# EAGLE board CT_schematic (EAGLE 7.6.0)

Size 100 x 80 mm. Coordinates in mm from the lower left corner, seen from the top.
Outline: 0,0 100,0 100,80 0,80 0,0
Copper layers (1*16): Top 0.035mm / dielectric 1.5mm / Bottom 0.035mm
Design rules "default": minimum track width 10mil, minimum drill 24mil, track to track 8mil, track to pad 8mil, pad to pad 8mil, via to via 8mil, smd to smd 8mil, copper to edge 40mil, drill to drill 8mil, minimum pad ring 10mil, minimum via ring 8mil, stop-mask expansion 4mil, vias tented up to drill 0mil, thermal gap 10mil

## Footprints (pad centres in the part's own frame; a part is rotated, then mirrored left to right if it is on the bottom)
C0603 = smd 0.8 x 0.8: 1 -0.762,0; 2 0.762,0
C0402 = smd 0.5 x 0.5: 1 -0.508,0; 2 0.508,0
C0805 = smd 1.2 x 1.3: 1 -1.016,0; 2 1.016,0
C1210 = smd 1.2 x 2.5: 1 -1.524,0; 2 1.524,0
EXV-9H = smd 3.505 x 1.676: 1 -2.857,0; 2 2.857,0
L0603 = smd 0.8 x 0.8: 1 -0.762,0; 2 0.762,0
R0603 = smd 0.8 x 0.8: 1 -0.762,0; 2 0.762,0
IND_PM3316 = smd 2.921 x 2.794: 1 -5.144,0; 2 5.144,0
L0806 = smd 1.016 x 1.524: 1 -0.889,0; 2 0.889,0
PJ-037B_PACKAGE = drill 3.7 square: 1 12,0 | drill 3.2 square: 2 6,0
LQFP176 = smd 0.3 x 1.2: 1 -10.75,-12.75; 2 -10.25,-12.75; 3 -9.75,-12.75; 4 -9.25,-12.75; 5 -8.75,-12.75; 6 -8.25,-12.75; 7 -7.75,-12.75; 8 -7.25,-12.75; 9 -6.75,-12.75; 10 -6.25,-12.75; 11 -5.75,-12.75; 12 -5.25,-12.75; 13 -4.75,-12.75; 14 -4.25,-12.75; 15 -3.75,-12.75; 16 -3.25,-12.75; 17 -2.75,-12.75; 18 -2.25,-12.75; 19 -1.75,-12.75; 20 -1.25,-12.75; 21 -0.75,-12.75; 22 -0.25,-12.75; 23 0.25,-12.75; 24 0.75,-12.75; 25 1.25,-12.75; 26 1.75,-12.75; 27 2.25,-12.75; 28 2.75,-12.75; 29 3.25,-12.75; 30 3.75,-12.75; 31 4.25,-12.75; 32 4.75,-12.75; 33 5.25,-12.75; 34 5.75,-12.75; 35 6.25,-12.75; 36 6.75,-12.75; 37 7.25,-12.75; 38 7.75,-12.75; 39 8.25,-12.75; 40 8.75,-12.75; 41 9.25,-12.75; 42 9.75,-12.75; 43 10.25,-12.75; 44 10.75,-12.75; 89 10.75,12.75; 90 10.25,12.75; 91 9.75,12.75; 92 9.25,12.75; 93 8.75,12.75; 94 8.25,12.75; 95 7.75,12.75; 96 7.25,12.75; 97 6.75,12.75; 98 6.25,12.75; 99 5.75,12.75; 100 5.25,12.75; 101 4.75,12.75; 102 4.25,12.75; 103 3.75,12.75; 104 3.25,12.75; 105 2.75,12.75; 106 2.25,12.75; 107 1.75,12.75; 108 1.25,12.75; 109 0.75,12.75; 110 0.25,12.75; 111 -0.25,12.75; 112 -0.75,12.75; 113 -1.25,12.75; 114 -1.75,12.75; 115 -2.25,12.75; 116 -2.75,12.75; 117 -3.25,12.75; 118 -3.75,12.75; 119 -4.25,12.75; 120 -4.75,12.75; 121 -5.25,12.75; 122 -5.75,12.75; 123 -6.25,12.75; 124 -6.75,12.75; 125 -7.25,12.75; 126 -7.75,12.75; 127 -8.25,12.75; 128 -8.75,12.75; 129 -9.25,12.75; 130 -9.75,12.75; 131 -10.25,12.75; 132 -10.75,12.75 | smd 1.2 x 0.3: 45 12.75,-10.75; 46 12.75,-10.25; 47 12.75,-9.75; 48 12.75,-9.25; 49 12.75,-8.75; 50 12.75,-8.25; 51 12.75,-7.75; 52 12.75,-7.25; 53 12.75,-6.75; 54 12.75,-6.25; 55 12.75,-5.75; 56 12.75,-5.25; 57 12.75,-4.75; 58 12.75,-4.25; 59 12.75,-3.75; 60 12.75,-3.25; 61 12.75,-2.75; 62 12.75,-2.25; 63 12.75,-1.75; 64 12.75,-1.25; 65 12.75,-0.75; 66 12.75,-0.25; 67 12.75,0.25; 68 12.75,0.75; 69 12.75,1.25; 70 12.75,1.75; 71 12.75,2.25; 72 12.75,2.75; 73 12.75,3.25; 74 12.75,3.75; 75 12.75,4.25; 76 12.75,4.75; 77 12.75,5.25; 78 12.75,5.75; 79 12.75,6.25; 80 12.75,6.75; 81 12.75,7.25; 82 12.75,7.75; 83 12.75,8.25; 84 12.75,8.75; 85 12.75,9.25; 86 12.75,9.75; 87 12.75,10.25; 88 12.75,10.75; 133 -12.75,10.75; 134 -12.75,10.25; 135 -12.75,9.75; 136 -12.75,9.25; 137 -12.75,8.75; 138 -12.75,8.25; 139 -12.75,7.75; 140 -12.75,7.25; 141 -12.75,6.75; 142 -12.75,6.25; 143 -12.75,5.75; 144 -12.75,5.25; 145 -12.75,4.75; 146 -12.75,4.25; 147 -12.75,3.75; 148 -12.75,3.25; 149 -12.75,2.75; 150 -12.75,2.25; 151 -12.75,1.75; 152 -12.75,1.25; 153 -12.75,0.75; 154 -12.75,0.25; 155 -12.75,-0.25; 156 -12.75,-0.75; 157 -12.75,-1.25; 158 -12.75,-1.75; 159 -12.75,-2.25; 160 -12.75,-2.75; 161 -12.75,-3.25; 162 -12.75,-3.75; 163 -12.75,-4.25; 164 -12.75,-4.75; 165 -12.75,-5.25; 166 -12.75,-5.75; 167 -12.75,-6.25; 168 -12.75,-6.75; 169 -12.75,-7.25; 170 -12.75,-7.75; 171 -12.75,-8.25; 172 -12.75,-8.75; 173 -12.75,-9.25; 174 -12.75,-9.75; 175 -12.75,-10.25; 176 -12.75,-10.75
SOT-23-6 = smd 1.1 x 0.6: 1 -1.4,0.95; 2 -1.4,0; 3 -1.4,-0.95; 4 1.4,-0.95; 5 1.4,0; 6 1.4,0.95
SSOP-28 = smd 1.5 x 0.4: 1 -3.625,4.225; 2 -3.625,3.575; 3 -3.625,2.925; 4 -3.625,2.275; 5 -3.625,1.625; 6 -3.625,0.975; 7 -3.625,0.325; 8 -3.625,-0.325; 9 -3.625,-0.975; 10 -3.625,-1.625; 11 -3.625,-2.275; 12 -3.625,-2.925; 13 -3.625,-3.575; 14 -3.625,-4.225; 15 3.625,-4.225; 16 3.625,-3.575; 17 3.625,-2.925; 18 3.625,-2.275; 19 3.625,-1.625; 20 3.625,-0.975; 21 3.625,-0.325; 22 3.625,0.325; 23 3.625,0.975; 24 3.625,1.625; 25 3.625,2.275; 26 3.625,2.925; 27 3.625,3.575; 28 3.625,4.225
FCI_10118193-0001LF = smd 0.4 x 1.35: 1 -1.3,2.675; 2 -0.65,2.675; 3 0,2.675; 4 0.65,2.675; 5 1.3,2.675 | smd 1.6 x 1.4: 6 -3.2,2.45; 7 3.2,2.45 | smd 1.9 x 1.9: 8 -1.2,0; 9 1.2,0 | hole 0.5: -3.3,0; 3.3,0
SOT-23-8 = smd 0.4 x 1.2: 1 -0.975,-1.3; 2 -0.325,-1.3; 3 0.325,-1.3; 4 0.975,-1.3; 5 0.975,1.3; 6 0.325,1.3; 7 -0.325,1.3; 8 -0.975,1.3
182-009-MALE = drill 1.194 pad 1.524 octagon: 1 -5.537,10.923; 2 -2.769,10.923; 3 0,10.923; 4 2.769,10.923; 5 5.537,10.923; 6 -4.153,8.08; 7 -1.384,8.08; 8 1.384,8.08; 9 4.153,8.08 | hole 3.048: -12.446,9.501; 12.446,9.501
TFBGA-153 = smd 0.3 x 0.3: A1 -3.25,3.25; A2 -2.75,3.25; A3 -2.25,3.25; A4 -1.75,3.25; A5 -1.25,3.25; A6 -0.75,3.25; A7 -0.25,3.25; A8 0.25,3.25; A9 0.75,3.25; A10 1.25,3.25; A11 1.75,3.25; A12 2.25,3.25; A13 2.75,3.25; A14 3.25,3.25; B1 -3.25,2.75; B2 -2.75,2.75; B3 -2.25,2.75; B4 -1.75,2.75; B5 -1.25,2.75; B6 -0.75,2.75; B7 -0.25,2.75; B8 0.25,2.75; B9 0.75,2.75; B10 1.25,2.75; B11 1.75,2.75; B12 2.25,2.75; B13 2.75,2.75; B14 3.25,2.75; C1 -3.25,2.25; C2 -2.75,2.25; C3 -2.25,2.25; C4 -1.75,2.25; C5 -1.25,2.25; C6 -0.75,2.25; C7 -0.25,2.25; C8 0.25,2.25; C9 0.75,2.25; C10 1.25,2.25; C11 1.75,2.25; C12 2.25,2.25; C13 2.75,2.25; C14 3.25,2.25; D1 -3.25,1.75; D2 -2.75,1.75; D3 -2.25,1.75; D4 -1.75,1.75; D12 2.25,1.75; D13 2.75,1.75; D14 3.25,1.75; E1 -3.25,1.25; E2 -2.75,1.25; E3 -2.25,1.25; E5 -1.25,1.25; E6 -0.75,1.25; E7 -0.25,1.25; E8 0.25,1.25; E9 0.75,1.25; E10 1.25,1.25; E12 2.25,1.25; E13 2.75,1.25; E14 3.25,1.25; F1 -3.25,0.75; F2 -2.75,0.75; F3 -2.25,0.75; F5 -1.25,0.75; F10 1.25,0.75; F12 2.25,0.75; F13 2.75,0.75; F14 3.25,0.75; G1 -3.25,0.25; G2 -2.75,0.25; G3 -2.25,0.25; G5 -1.25,0.25; G10 1.25,0.25; G12 2.25,0.25; G13 2.75,0.25; G14 3.25,0.25; H1 -3.25,-0.25; H2 -2.75,-0.25; H3 -2.25,-0.25; H5 -1.25,-0.25; H10 1.25,-0.25; H12 2.25,-0.25; H13 2.75,-0.25; H14 3.25,-0.25; J1 -3.25,-0.75; J2 -2.75,-0.75; J3 -2.25,-0.75; J5 -1.25,-0.75; J10 1.25,-0.75; J12 2.25,-0.75; J13 2.75,-0.75; J14 3.25,-0.75; K1 -3.25,-1.25; K2 -2.75,-1.25; K3 -2.25,-1.25; K5 -1.25,-1.25; K6 -0.75,-1.25; K7 -0.25,-1.25; K8 0.25,-1.25; K9 0.75,-1.25; K10 1.25,-1.25; K12 2.25,-1.25; K13 2.75,-1.25; K14 3.25,-1.25; L1 -3.25,-1.75; L2 -2.75,-1.75; L3 -2.25,-1.75; L12 2.25,-1.75; L13 2.75,-1.75; L14 3.25,-1.75; M1 -3.25,-2.25; M2 -2.75,-2.25; M3 -2.25,-2.25; M4 -1.75,-2.25; M5 -1.25,-2.25; M6 -0.75,-2.25; M7 -0.25,-2.25; M8 0.25,-2.25; M9 0.75,-2.25; M10 1.25,-2.25; M11 1.75,-2.25; M12 2.25,-2.25; M13 2.75,-2.25; M14 3.25,-2.25; N1 -3.25,-2.75; N2 -2.75,-2.75; N3 -2.25,-2.75; N4 -1.75,-2.75; N5 -1.25,-2.75; N6 -0.75,-2.75; N7 -0.25,-2.75; N8 0.25,-2.75; N9 0.75,-2.75; N10 1.25,-2.75; N11 1.75,-2.75; N12 2.25,-2.75; N13 2.75,-2.75; N14 3.25,-2.75; P1 -3.25,-3.25; P2 -2.75,-3.25; P3 -2.25,-3.25; P4 -1.75,-3.25; P5 -1.25,-3.25; P6 -0.75,-3.25; P7 -0.25,-3.25; P8 0.25,-3.25; P9 0.75,-3.25; P10 1.25,-3.25; P11 1.75,-3.25; P12 2.25,-3.25; P13 2.75,-3.25; P14 3.25,-3.25
RTL8201FL-VB-CG = smd 0.27 x 1: 1 0,0; 2 0.5,0; 3 1,0; 4 1.5,0; 5 2,0; 6 2.5,0; 7 3,0; 8 3.5,0; 9 4,0; 10 4.5,0; 11 5,0; 12 5.5,0; 25 5.5,8; 26 5,8; 27 4.5,8; 28 4,8; 29 3.5,8; 30 3,8; 31 2.5,8; 32 2,8; 33 1.5,8; 34 1,8; 35 0.5,8; 36 0,8 | smd 1 x 0.27: 13 6.75,1.25; 14 6.75,1.75; 15 6.75,2.25; 16 6.75,2.75; 17 6.75,3.25; 18 6.75,3.75; 19 6.75,4.25; 20 6.75,4.75; 21 6.75,5.25; 22 6.75,5.75; 23 6.75,6.25; 24 6.75,6.75; 37 -1.25,6.75; 38 -1.25,6.25; 39 -1.25,5.75; 40 -1.25,5.25; 41 -1.25,4.75; 42 -1.25,4.25; 43 -1.25,3.75; 44 -1.25,3.25; 45 -1.25,2.75; 46 -1.25,2.25; 47 -1.25,1.75; 48 -1.25,1.25
7498011122R = smd 0.71 x 2.29: 1 -3.545,-3.18; 2 -2.525,-3.18; 3 -1.505,-3.18; 4 -0.485,-3.18; 5 0.535,-3.18; 6 1.555,-3.18; 8 3.595,-3.18; 9 5.635,-3.18; 10 6.655,-3.18; 11 -6.605,-3.18; 12 -5.585,-3.18 | smd 1.4 x 2.54: 13 -8.51,10.2; 14 8.51,10.2 | hole 1.4: -3.5,0; 3.5,0
USB-A-H = drill 0.914: 1 2.718,3.493; 2 2.718,1.003; 3 2.718,-1.003; 4 2.718,-3.493 | drill 2.311: 5 0,-6.566; 6 0,6.566
SOT143B = smd 1 x 0.7: 1 -0.75,-1 | smd 0.6 x 0.7: 2 0.95,-1; 3 0.95,1; 4 -0.95,1
ABS07-32.768KHZ-7-T = smd 1.1 x 2.4: 1 -2.5,0; 2 0,0
ABLS-25.000MHZ-B2F-T = smd 5.6 x 2.8: 1 -3.81,0; 2 5.69,0
ASFL1 = smd 1.7 x 1.5: 1 -1.27,-1.1; 2 1.27,-1.1; 3 1.27,1.1; 4 -1.27,1.1
HTSSOP14 = smd 1.676 x 0.356: 1 -2.8,1.95; 2 -2.8,1.3; 3 -2.8,0.65; 4 -2.8,0; 5 -2.8,-0.65; 6 -2.8,-1.3; 7 -2.8,-1.95; 8 2.8,-1.95; 9 2.8,-1.3; 10 2.8,-0.65; 11 2.8,0; 12 2.8,0.65; 13 2.8,1.3; 14 2.8,1.95 | smd 3 x 5: 15 0,0 | drill 0.4 pad 0.45: P$1 -0.75,1.5; P$2 0.75,1.5; P$3 -0.75,0; P$4 0.8,0; P$5 -0.75,-1.5; P$6 0.9,-1.5
MSOP-8 = smd 1.499 x 0.432: 1 -2.184,0.965; 2 -2.184,0.33; 3 -2.184,-0.33; 4 -2.184,-0.965; 5 2.184,-0.965; 6 2.184,-0.33; 7 2.184,0.33; 8 2.184,0.965
SON-6 = smd 0.55 x 0.3: 1 -0.355,0.5 | smd 0.52 x 0.3: 2 -0.37,0; 3 -0.37,-0.5; 4 0.37,-0.5; 5 0.37,0; 6 0.37,0.5
SW_4-1437565-2 = smd 1.4 x 2.1: 1 -2.23,4.55; 2 -2.23,-4.55; 3 2.23,4.55; 4 2.23,-4.55
LGM67K-G1J2-24-Z = smd 0.8 x 1.4: A -2,0; C 0,0
NC7SZ125M5X = smd 1.3 x 0.7: 1 -1.3,0.95; 2 -1.3,0; 3 -1.3,-0.95; 4 1.3,-0.95; 5 1.3,0.95

## Placement (x,y rotation side)
C1  1e-06  [C0603]  -60.96,87.63 0 top  (outside the outline)
C2  1e-07  [C0603]  -64.77,87.63 0 top  (outside the outline)
C3  1e-07  [C0603]  -68.58,87.63 0 top  (outside the outline)
C4  1e-07  [C0603]  -72.39,87.63 0 top  (outside the outline)
C5  1e-07  [C0603]  -76.2,87.63 0 top  (outside the outline)
C6  1e-07  [C0603]  -80.01,87.63 0 top  (outside the outline)
C7  1e-07  [C0603]  -83.82,87.63 0 top  (outside the outline)
C8  1e-07  [C0603]  -87.63,87.63 0 top  (outside the outline)
C9  1e-07  [C0603]  -91.44,87.63 0 top  (outside the outline)
C10  1e-07  [C0603]  -95.25,87.63 0 top  (outside the outline)
C11  1e-07  [C0603]  -99.06,87.63 0 top  (outside the outline)
C12  1e-07  [C0603]  -15.24,92.71 0 top  (outside the outline)
C13  1e-07  [C0603]  -19.05,92.71 0 top  (outside the outline)
C14  1e-07  [C0603]  -22.86,92.71 0 top  (outside the outline)
C15  1e-07  [C0603]  -26.67,92.71 0 top  (outside the outline)
C16  1e-07  [C0603]  -30.48,92.71 0 top  (outside the outline)
C17  1e-07  [C0603]  -34.29,92.71 0 top  (outside the outline)
C18  4.7e-06  [C0603]  -34.29,87.63 0 top  (outside the outline)
C19  1e-08  [C0603]  -38.1,92.71 0 top  (outside the outline)
C20  1e-06  [C0603]  -41.91,92.71 0 top  (outside the outline)
C21  2.2e-06  [C0603]  -38.1,87.63 0 top  (outside the outline)
C22  2.2e-06  [C0603]  -41.91,87.63 0 top  (outside the outline)
C23  1e-11  [C0402]  -58.42,97.79 0 top  (outside the outline)
C24  1e-11  [C0402]  -62.23,97.79 0 top  (outside the outline)
C25  1e-11  [C0402]  -66.04,97.79 0 top  (outside the outline)
C26  1e-11  [C0402]  -69.85,97.79 0 top  (outside the outline)
C27  1e-07  [C0402]  -73.66,97.79 0 top  (outside the outline)
C28  4.7e-06  [C0805]  -85.09,69.85 0 top  (outside the outline)
C29  1e-07  [C0402]  -77.47,97.79 0 top  (outside the outline)
C30  1e-07  [C0402]  -81.28,97.79 0 top  (outside the outline)
C31  1e-07  [C0402]  -85.09,97.79 0 top  (outside the outline)
C32  1e-07  [C0402]  -88.9,97.79 0 top  (outside the outline)
C33  2.2e-06  [C0603]  -45.72,87.63 0 top  (outside the outline)
C34  2.2e-06  [C0603]  -49.53,87.63 0 top  (outside the outline)
C35  1e-07  [C0402]  -92.71,97.79 0 top  (outside the outline)
C36  1e-07  [C0402]  -96.52,97.79 0 top  (outside the outline)
C37  2.2e-06  [C0603]  -53.34,87.63 0 top  (outside the outline)
C38  2.2e-08  [C0402]  -43.18,97.79 0 top  (outside the outline)
C39  1e-06  [C0603]  -45.72,92.71 0 top  (outside the outline)
C40  1e-07  [C0402]  -15.24,102.87 0 top  (outside the outline)
C41  1e-08  [C0402]  -19.05,102.87 0 top  (outside the outline)
C42  1e-06  [C0603]  -49.53,92.71 0 top  (outside the outline)
C43  1e-07  [C0402]  -22.86,102.87 0 top  (outside the outline)
C44  1e-08  [C0402]  -26.67,102.87 0 top  (outside the outline)
C45  1e-07  [C0402]  -30.48,102.87 0 top  (outside the outline)
C46  1e-07  [C0402]  -34.29,102.87 0 top  (outside the outline)
C47  2.7e-11  [C0402]  -46.99,97.79 0 top  (outside the outline)
C48  2.7e-11  [C0402]  -50.8,97.79 0 top  (outside the outline)
C49  1e-08  [C0402]  -38.1,102.87 0 top  (outside the outline)
C50  1e-06  [C0603]  -53.34,92.71 0 top  (outside the outline)
C51  3.3e-09  [C0402]  -54.61,97.79 0 top  (outside the outline)
C52  1e-07  [C0402]  -41.91,102.87 0 top  (outside the outline)
C53  2.2e-05  [C1210]  -38.1,71.12 0 top  (outside the outline)
C54  2.2e-05  [C1210]  -44.45,71.12 0 top  (outside the outline)
C55  1e-05  [C0805]  -90.17,69.85 0 top  (outside the outline)
C56  1e-05  [C0805]  -95.25,69.85 0 top  (outside the outline)
C57  1e-06  [C0603]  -57.15,92.71 0 top  (outside the outline)
C58  1e-05  [C0805]  -15.24,77.47 0 top  (outside the outline)
C59  1e-05  [C0805]  -20.32,77.47 0 top  (outside the outline)
C60  1.6e-09  [C0603]  -57.15,87.63 0 top  (outside the outline)
C61  1e-07  [C0402]  -45.72,102.87 0 top  (outside the outline)
C62  0.0001  [EXV-9H]  -17.78,63.5 0 top  (outside the outline)
C63  0.0001  [EXV-9H]  -29.21,63.5 0 top  (outside the outline)
C64  1e-08  [C0402]  -49.53,102.87 0 top  (outside the outline)
C65  1e-08  [C0402]  -53.34,102.87 0 top  (outside the outline)
C66  1e-08  [C0402]  -57.15,102.87 0 top  (outside the outline)
F1  240.0  [L0603]  -60.96,92.71 0 top  (outside the outline)
I1  97.0  [R0603]  -64.77,92.71 0 top  (outside the outline)
I5  1.5e-06  [IND_PM3316]  -62.23,52.07 0 top  (outside the outline)
I6  3.3e-06  [L0806]  -50.8,69.85 0 top  (outside the outline)
J1  PJ-037B  [PJ-037B_PACKAGE]  -88.9,35.56 0 top  (outside the outline)
R2  1000.0  [R0603]  -68.58,92.71 0 top  (outside the outline)
R7  4700.0  [R0603]  -72.39,92.71 0 top  (outside the outline)
R8  4700.0  [R0603]  -76.2,92.71 0 top  (outside the outline)
R9  4700.0  [R0603]  -80.01,92.71 0 top  (outside the outline)
R10  2200.0  [R0603]  -83.82,92.71 0 top  (outside the outline)
R12  2200.0  [R0603]  -87.63,92.71 0 top  (outside the outline)
R14  47000.0  [R0603]  -49.53,77.47 0 top  (outside the outline)
R15  10000.0  [R0603]  -54.61,77.47 0 top  (outside the outline)
R16  10000.0  [R0603]  -59.69,77.47 0 top  (outside the outline)
R17  10000.0  [R0603]  -64.77,77.47 0 top  (outside the outline)
R18  10000.0  [R0603]  -69.85,77.47 0 top  (outside the outline)
R19  1270.0  [R0603]  -91.44,92.71 0 top  (outside the outline)
R20  10000.0  [R0603]  -74.93,77.47 0 top  (outside the outline)
R21  10000.0  [R0603]  -80.01,77.47 0 top  (outside the outline)
R22  4700.0  [R0603]  -95.25,92.71 0 top  (outside the outline)
R23  10000.0  [R0603]  -85.09,77.47 0 top  (outside the outline)
R24  10000.0  [R0603]  -90.17,77.47 0 top  (outside the outline)
R25  120.0  [R0603]  -99.06,92.71 0 top  (outside the outline)
R26  100000.0  [R0603]  -34.29,77.47 0 top  (outside the outline)
R27  34000.0  [R0603]  -95.25,77.47 0 top  (outside the outline)
R28  34000.0  [R0603]  -15.24,82.55 0 top  (outside the outline)
R29  34000.0  [R0603]  -20.32,82.55 0 top  (outside the outline)
R30  34000.0  [R0603]  -25.4,82.55 0 top  (outside the outline)
R31  34000.0  [R0603]  -30.48,82.55 0 top  (outside the outline)
R32  34000.0  [R0603]  -35.56,82.55 0 top  (outside the outline)
R33  34000.0  [R0603]  -40.64,82.55 0 top  (outside the outline)
R34  34000.0  [R0603]  -45.72,82.55 0 top  (outside the outline)
R35  34000.0  [R0603]  -50.8,82.55 0 top  (outside the outline)
R36  34000.0  [R0603]  -55.88,82.55 0 top  (outside the outline)
R37  0.1  [R0603]  -15.24,97.79 0 top  (outside the outline)
R38  0.1  [R0603]  -19.05,97.79 0 top  (outside the outline)
R39  200.0  [R0603]  -22.86,97.79 0 top  (outside the outline)
R40  200.0  [R0603]  -26.67,97.79 0 top  (outside the outline)
R41  2490.0  [R0603]  -30.48,97.79 0 top  (outside the outline)
R42  4700.0  [R0603]  -34.29,97.79 0 top  (outside the outline)
R43  10000.0  [R0603]  -60.96,82.55 0 top  (outside the outline)
R44  10000.0  [R0603]  -66.04,82.55 0 top  (outside the outline)
R45  10000.0  [R0603]  -71.12,82.55 0 top  (outside the outline)
R46  10000.0  [R0603]  -76.2,82.55 0 top  (outside the outline)
R47  10000.0  [R0603]  -81.28,82.55 0 top  (outside the outline)
R48  10000.0  [R0603]  -86.36,82.55 0 top  (outside the outline)
R49  71007.101651032  [R0603]  -29.21,77.47 0 top  (outside the outline)
R50  22000.0  [R0603]  -91.44,82.55 0 top  (outside the outline)
R51  47000.0  [R0603]  -96.52,82.55 0 top  (outside the outline)
R52  56000.0  [R0603]  -15.24,87.63 0 top  (outside the outline)
R53  18000.0  [R0603]  -20.32,87.63 0 top  (outside the outline)
R54  10000.0  [R0603]  -25.4,87.63 0 top  (outside the outline)
R55  10000.0  [R0603]  -30.48,87.63 0 top  (outside the outline)
R56  9100.0  [R0603]  -38.1,97.79 0 top  (outside the outline)
R57  680000.0  [R0603]  -39.37,77.47 0 top  (outside the outline)
R58  120000.0  [R0603]  -44.45,77.47 0 top  (outside the outline)
U1  STM32F429IGT6  [LQFP176]  -45.72,13.97 0 top  (outside the outline)
U2  MAX4995AAUT+T  [SOT-23-6]  -60.96,69.85 0 top  (outside the outline)
U3  FT232RL-REEL  [SSOP-28]  -52.07,36.83 0 top  (outside the outline)
U4  10118193-0001LF  [FCI_10118193-0001LF]  -92.71,50.8 0 top  (outside the outline)
U5  MAX3051EKA+T  [SOT-23-8]  -55.88,69.85 0 top  (outside the outline)
U6  182-009-113R531  [182-009-MALE]  -82.55,6.35 0 top  (outside the outline)
U7  mtfc4gmcdm  [TFBGA-153]  -20.32,38.1 0 top  (outside the outline)
U8  RTL8201FL-VB-CG  [RTL8201FL-VB-CG]  -72.39,31.75 0 top  (outside the outline)
U9  7498011122R  [7498011122R]  -22.86,7.62 0 top  (outside the outline)
U10  61400416021  [USB-A-H]  -34.29,36.83 0 top  (outside the outline)
U11  prtr5v0u2ax  [SOT143B]  -69.85,102.87 0 top  (outside the outline)
U12  ABS07-32.768KHZ-7-T  [ABS07-32.768KHZ-7-T]  -91.44,63.5 0 top  (outside the outline)
U13  ABLS-25.000MHZ-B2F-T  [ABLS-25.000MHZ-B2F-T]  -48.26,63.5 0 top  (outside the outline)
U14  ABLS-25.000MHZ-B2F-T  [ABLS-25.000MHZ-B2F-T]  -68.58,63.5 0 top  (outside the outline)
U15  ASFL1-12MHZ-NCS  [ASFL1]  -83.82,52.07 0 top  (outside the outline)
U16  tps54325PWP  [HTSSOP14]  -17.78,71.12 0 top  (outside the outline)
U17  TPS61085DGKR  [MSOP-8]  -50.8,52.07 0 top  (outside the outline)
U18  TPS3895ADRYR  [SON-6]  -73.66,101.6 0 top  (outside the outline)
U19  4-1437565-2  [SW_4-1437565-2]  -27.94,53.34 0 top  (outside the outline)
U20  Q65110A2395  [LGM67K-G1J2-24-Z]  -26.67,71.12 0 top  (outside the outline)
U21  nc7sz125m5x  [NC7SZ125M5X]  -66.04,69.85 0 top  (outside the outline)
U22  nc7sz125m5x  [NC7SZ125M5X]  -72.39,69.85 0 top  (outside the outline)
U23  nc7sz125m5x  [NC7SZ125M5X]  -78.74,69.85 0 top  (outside the outline)

## Library data of the parts
C1-C66 F1 I1 I5 I6 J1 R2 R7-R10 R12 R14-R58 U1-U23 = circuit_tree

## Nets
CLK_CRYSTAL_U1_9: C23.1 U1.9 U12.1
CLK_CRYSTAL_U1_10: C24.1 U1.10 U12.2
CLK_CRYSTAL_U1_29: C25.1 U1.29 U13.1
CLK_CRYSTAL_U1_30: C26.1 U1.30 U13.2
CLK_CRYSTAL_U8_42: C48.1 U8.42 U14.1
CLK_CRYSTAL_U8_43: C47.1 U8.43 U14.2
CLK_U3_27: U3.27 U15.3
GND: C1.2 C2.2 C3.2 C4.2 C5.2 C6.2 C7.2 C8.2 C9.2 C10.2 C11.2 C12.2 C13.2 C14.2 C15.2 C16.2 C17.2 C18.2 C19.2 C20.2 C21.2 C22.2 C23.2 C24.2 C25.2 C26.2 C27.2 C28.2 C29.2 C30.2 C31.2 C32.2 C33.2 C34.2 C35.2 C36.2 C37.2 C38.2 C39.2 C40.2 C41.2 C42.2 C43.2 C44.2 C45.2 C46.2 C47.2 C48.2 C49.2 C50.2 C51.2 C53.2 C54.2 C55.2 C56.2 C57.2 C58.2 C59.1 C59.2 C60.1 C60.2 C61.2 C62.2 C63.2 C64.2 C65.2 C66.2 J1.2 R2.2 R14.2 R17.2 R18.2 R19.2 R21.2 R24.2 R26.2 R37.2 R38.2 R41.2 R43.2 R44.2 R46.2 R50.2 R53.2 R56.2 R58.2 U1.14 U1.22 U1.37 U1.61 U1.71 U1.90 U1.102 U1.113 U1.126 U1.135 U1.148 U1.158 U2.2 U3.7 U3.18 U3.21 U3.25 U3.26 U4.5 U4.6 U4.7 U4.8 U4.9 U5.2 U6.5 U7.C4 U7.E7 U7.G5 U7.H10 U7.K8 U7.N2 U7.N5 U7.P4 U7.P6 U8.7 U8.20 U8.33 U8.47 U9.9 U10.4 U10.5 U10.6 U11.1 U15.2 U16.5 U16.8 U16.9 U16.15 U17.4 U18.2 U20.C U21.1 U21.3 U22.1 U22.3 U23.1 U23.3
NET_U1_31: R9.1 U1.31 U23.4
NET_U1_33: R10.1 U1.33 U8.30
NET_U1_39: C19.1 C20.1 F1.1 U1.38 U1.39
NET_U1_42: R12.1 U1.42 U8.31
NET_U1_48: R18.1 U1.48
NET_U1_58: R17.1 U1.58
NET_U1_81: C21.1 U1.81
NET_U1_121: R19.1 U1.121
NET_U1_125: C22.1 U1.125
NET_U1_166: R16.1 U1.166
NET_U1_171: R15.1 U1.171
NET_U1_175: U20.A
NET_U1_176: U19.3 U19.4
NET_U2_3: R14.1 U2.3
NET_U3_14: R23.1 U3.14
NET_U3_17: C29.1 U3.17
NET_U3_19: R24.1 U3.19
NET_U4_1: R22.1 U4.1
NET_U4_2: U3.16 U4.2
NET_U4_3: U3.15 U4.3
NET_U4_19: R22.2
NET_U5_6: R25.2 U5.6
NET_U5_8: R26.1 U5.8
NET_U6_2: R25.2 U5.6 U6.2
NET_U6_3: R25.1 U5.7 U6.3
NET_U7_C2: C34.1 C35.1 U7.C2
NET_U7_K5: R8.1 U7.K5 U22.4
NET_U8_6: C39.1 C40.1 C41.1 I1.1 U8.6 U8.41
NET_U8_10: R46.1 U8.10
NET_U8_28: U8.28
NET_U8_29: R7.1 U8.29 U21.4
NET_U8_32: R42.1 U8.32
NET_U8_34: R44.1 U8.34
NET_U8_35: R45.1 U8.35
NET_U8_40: C46.1 U8.40
NET_U8_46: R41.1 U8.46
NET_U8_48: C45.1 U8.48
NET_U9_1: U8.1 U9.1
NET_U9_3: U8.2 U9.3
NET_U9_4: U8.4 U9.4
NET_U9_5: C38.1 U9.2 U9.5
NET_U9_6: U8.5 U9.6
NET_U9_8: R38.1 U9.8
NET_U9_10: R39.1 U9.10
NET_U9_12: R40.1 U9.12
NET_U9_13: R37.1 U9.13 U9.14
NET_U9_34: R39.2
NET_U9_35: R40.2
NET_U16_2: R49.2 R50.1 U16.2
NET_U16_3: C50.1 U16.3
NET_U16_4: C51.1 U16.4
NET_U16_10: C52.1 I5.1 U16.10 U16.11
NET_U16_12: C52.2 U16.12
NET_U17_1: R51.1 U17.1
NET_U17_2: R52.1 R53.1 U17.2
NET_U17_3: U17.3
NET_U17_5: I6.1 U17.5
NET_U17_7: U17.7
NET_U17_ATNET_3: R52.2
NET_U17_ATNET_4: R51.2
NET_U18_1: R55.1 R56.1 U18.1
NET_U18_3: R57.2 R58.1 U18.3
NET_U18_4: R54.1 U18.4 U21.2 U22.2 U23.2
NET_U19_1: R2.1 U19.1 U19.2
PROC_CAN1_RX: U1.11 U5.4
PROC_CAN1_TX: U1.128 U5.1
PROC_ETH_COL: U1.44 U8.38
PROC_ETH_CRS: U1.40 U8.36
PROC_ETH_RX_CLK: U1.41 U8.19
PROC_ETH_RX_DV: R43.1 U1.53 U8.13
PROC_ETH_RX_ER: R48.1 U1.12 U8.39
PROC_ETH_RXD0: U1.54 U8.14
PROC_ETH_RXD1: U1.55 U8.16
PROC_ETH_RXD2: U1.56 U8.17
PROC_ETH_RXD3: R47.1 U1.57 U8.18
PROC_ETH_TX_CLK: U1.35 U8.22
PROC_ETH_TX_EN: U1.80 U8.27
PROC_ETH_TXD0: U1.92 U8.23
PROC_ETH_TXD1: U1.93 U8.24
PROC_ETH_TXD2: U1.34 U8.25
PROC_ETH_TXD3: U1.1 U8.26
PROC_GPIO_TO_U1_USB_FAULT: R20.1 U1.3 U2.6
PROC_GPIO_TO_U1_VBUS_EN: R21.1 U1.2 U2.4
PROC_SDIO_CK: R36.1 U1.141 U7.M6
PROC_SDIO_CMD: R35.1 U1.144 U7.M5
PROC_SDIO_D0: R27.1 U1.117 U7.A3
PROC_SDIO_D1: R28.1 U1.118 U7.A4
PROC_SDIO_D2: R29.1 U1.139 U7.A5
PROC_SDIO_D3: R30.1 U1.140 U7.B2
PROC_SDIO_D4: R31.1 U1.167 U7.B3
PROC_SDIO_D5: R32.1 U1.168 U7.B4
PROC_SDIO_D6: R33.1 U1.115 U7.B5
PROC_SDIO_D7: R34.1 U1.116 U7.B6
PROC_UART7_RX: U1.24 U3.1
PROC_UART7_TX: U1.25 U3.5
PROC_USB_OTG_FS_DM: U1.122 U10.2 U11.3
PROC_USB_OTG_FS_DP: U1.123 U10.3 U11.2
PROC_USB_OTG_FS_VBUS: U1.120 U2.1 U10.1 U11.4
VCC_S1_4V5: C55.1 C56.1 C57.1 C58.1 C62.1 C63.1 I6.2 J1.1 U16.7 U16.13 U16.14 U17.3 U17.6
VCC_TIER1_3V3: C1.1 C2.1 C3.1 C4.1 C5.1 C6.1 C7.1 C8.1 C9.1 C10.1 C11.1 C12.1 C13.1 C14.1 C15.1 C16.1 C17.1 C18.1 C27.1 C28.1 C30.1 C31.1 C32.1 C33.1 C36.1 C37.1 C42.1 C43.1 C44.1 C49.1 C53.1 C54.1 C61.1 C64.1 C65.1 C66.1 F1.2 I1.2 I5.2 R7.2 R8.2 R9.2 R10.2 R12.2 R15.2 R16.2 R20.2 R23.2 R27.2 R28.2 R29.2 R30.2 R31.2 R32.2 R33.2 R34.2 R35.2 R36.2 R42.2 R45.2 R47.2 R48.2 R49.1 R54.2 R55.2 R57.1 U1.6 U1.15 U1.23 U1.36 U1.49 U1.62 U1.72 U1.82 U1.91 U1.103 U1.114 U1.127 U1.136 U1.149 U1.159 U1.172 U3.4 U3.20 U5.3 U7.C6 U7.E6 U7.F5 U7.J10 U7.K9 U7.M4 U7.N4 U7.P3 U7.P5 U8.15 U8.21 U8.37 U15.4 U16.1 U18.6 U21.5 U22.5 U23.5
VCC_TIER1_5V0: C59.2 R52.2 U2.5

## Tracks (layer width: path | path; a pad name or v marks a point on that pad's centre or on a via)
CLK_CRYSTAL_U1_9  (2 unrouted)
CLK_CRYSTAL_U1_10  (2 unrouted)
CLK_CRYSTAL_U1_29  (2 unrouted)
CLK_CRYSTAL_U1_30  (2 unrouted)
CLK_CRYSTAL_U8_42  (2 unrouted)
CLK_CRYSTAL_U8_43  (2 unrouted)
CLK_U3_27  (1 unrouted)
GND  (142 unrouted)
NET_U1_31  (2 unrouted)
NET_U1_33  (2 unrouted)
NET_U1_39  (4 unrouted)
NET_U1_42  (2 unrouted)
NET_U1_48  (1 unrouted)
NET_U1_58  (1 unrouted)
NET_U1_81  (1 unrouted)
NET_U1_121  (1 unrouted)
NET_U1_125  (1 unrouted)
NET_U1_166  (1 unrouted)
NET_U1_171  (1 unrouted)
NET_U1_176  (1 unrouted)
NET_U2_3  (1 unrouted)
NET_U3_14  (1 unrouted)
NET_U3_17  (1 unrouted)
NET_U3_19  (1 unrouted)
NET_U4_1  (1 unrouted)
NET_U4_2  (1 unrouted)
NET_U4_3  (1 unrouted)
NET_U5_6  (1 unrouted)
NET_U5_8  (1 unrouted)
NET_U6_2  (2 unrouted)
NET_U6_3  (2 unrouted)
NET_U7_C2  (2 unrouted)
NET_U7_K5  (2 unrouted)
NET_U8_6  (5 unrouted)
NET_U8_10  (1 unrouted)
NET_U8_29  (2 unrouted)
NET_U8_32  (1 unrouted)
NET_U8_34  (1 unrouted)
NET_U8_35  (1 unrouted)
NET_U8_40  (1 unrouted)
NET_U8_46  (1 unrouted)
NET_U8_48  (1 unrouted)
NET_U9_1  (1 unrouted)
NET_U9_3  (1 unrouted)
NET_U9_4  (1 unrouted)
NET_U9_5  (2 unrouted)
NET_U9_6  (1 unrouted)
NET_U9_8  (1 unrouted)
NET_U9_10  (1 unrouted)
NET_U9_12  (1 unrouted)
NET_U9_13  (2 unrouted)
NET_U16_2  (2 unrouted)
NET_U16_3  (1 unrouted)
NET_U16_4  (1 unrouted)
NET_U16_10  (3 unrouted)
NET_U16_12  (1 unrouted)
NET_U17_1  (1 unrouted)
NET_U17_2  (2 unrouted)
NET_U17_5  (1 unrouted)
NET_U18_1  (2 unrouted)
NET_U18_3  (2 unrouted)
NET_U18_4  (4 unrouted)
NET_U19_1  (2 unrouted)
PROC_CAN1_RX  (1 unrouted)
PROC_CAN1_TX  (1 unrouted)
PROC_ETH_COL  (1 unrouted)
PROC_ETH_CRS  (1 unrouted)
PROC_ETH_RX_CLK  (1 unrouted)
PROC_ETH_RX_DV  (2 unrouted)
PROC_ETH_RX_ER  (2 unrouted)
PROC_ETH_RXD0  (1 unrouted)
PROC_ETH_RXD1  (1 unrouted)
PROC_ETH_RXD2  (1 unrouted)
PROC_ETH_RXD3  (2 unrouted)
PROC_ETH_TX_CLK  (1 unrouted)
PROC_ETH_TX_EN  (1 unrouted)
PROC_ETH_TXD0  (1 unrouted)
PROC_ETH_TXD1  (1 unrouted)
PROC_ETH_TXD2  (1 unrouted)
PROC_ETH_TXD3  (1 unrouted)
PROC_GPIO_TO_U1_USB_FAULT  (2 unrouted)
PROC_GPIO_TO_U1_VBUS_EN  (2 unrouted)
PROC_SDIO_CK  (2 unrouted)
PROC_SDIO_CMD  (2 unrouted)
PROC_SDIO_D0  (2 unrouted)
PROC_SDIO_D1  (2 unrouted)
PROC_SDIO_D2  (2 unrouted)
PROC_SDIO_D3  (2 unrouted)
PROC_SDIO_D4  (2 unrouted)
PROC_SDIO_D5  (2 unrouted)
PROC_SDIO_D6  (2 unrouted)
PROC_SDIO_D7  (2 unrouted)
PROC_UART7_RX  (1 unrouted)
PROC_UART7_TX  (1 unrouted)
PROC_USB_OTG_FS_DM  (2 unrouted)
PROC_USB_OTG_FS_DP  (2 unrouted)
PROC_USB_OTG_FS_VBUS  (3 unrouted)
VCC_S1_4V5  (12 unrouted)
VCC_TIER1_3V3  (102 unrouted)
VCC_TIER1_5V0  (2 unrouted)